# EAGLE board dpad (EAGLE 9.6.2)
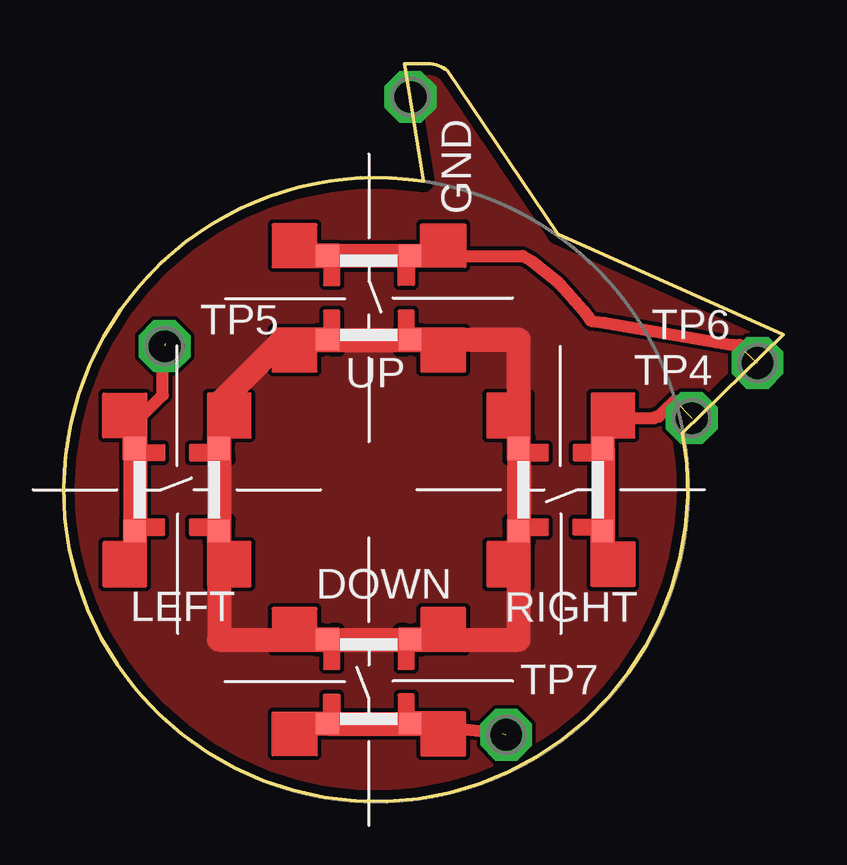
[diagram p0: board, top side]

Size 30 x 30.76 mm. Coordinates in mm from the lower left corner, seen from the top.
Outline: 25.8,15.36 30,19.46 20.6,23.66 16,30.46 arc30 15.3,30.76 14.2,30.76 15,25.86 arc289 25.8,15.36
Copper layers (1*16): Top 0.035mm / dielectric 1.5mm / Bottom 0.035mm
Design rules "default *": minimum track width 6mil, minimum drill 10mil, track to track 6mil, track to pad 6mil, pad to pad 6mil, via to via 6mil, smd to smd 6mil, copper to edge 15mil, drill to drill 6mil, minimum pad ring 5mil, minimum via ring 5mil, stop-mask expansion 4mil, vias tented up to drill 0mil, thermal gap 10mil

## Footprints (pad centres in the part's own frame; a part is rotated, then mirrored left to right if it is on the bottom)
SMD_BUTTON = smd 0.95 x 0.9: 1 -1.725,1.75; 2 1.725,1.75; 3 -1.725,-1.75; 4 1.725,-1.75
P1-13 = drill 1.321 pad 2.159 octagon: TP 0,0

## Placement (x,y rotation side)
DOWN  [SMD_BUTTON]  12.73,4.99 180 top
GND  TPPAD1-13  [P1-13]  14.46,29.37 0 top
LEFT  [SMD_BUTTON]  4.73,12.99 90 top
RIGHT  [SMD_BUTTON]  20.73,12.99 270 top
TP4  TPPAD1-13  [P1-13]  26.19,15.98 0 top
TP5  TPPAD1-13  [P1-13]  4.21,18.98 0 top
TP6  TPPAD1-13  [P1-13]  28.93,18.28 0 top
TP7  TPPAD1-13  [P1-13]  18.45,2.78 0 top
UP  [SMD_BUTTON]  12.73,20.99 0 top

## Library data of the parts
DOWN LEFT RIGHT UP = lib; MPN: B3F-1000; OC_FARNELL: 176432; OC_NEWARK: 36M3542
GND TP4-TP7 = testpad

## Nets
GND: DOWN.3 DOWN.4 GND.TP LEFT.3 LEFT.4 RIGHT.3 RIGHT.4 UP.3 UP.4
N$1: TP6.TP UP.1 UP.2
N$2: LEFT.1 LEFT.2 TP5.TP
N$3: RIGHT.1 RIGHT.2 TP4.TP
N$4: DOWN.1 DOWN.2 TP7.TP

## Tracks (layer width: path | path; a pad name or v marks a point on that pad's centre or on a via)
GND
  Top 0.152: 15.3,30.76 14.2,30.76 15,25.86 arc289 25.8,15.36 30,19.46 20.6,23.66 16,30.46 arc30 15.3,30.76
  Top 1: UP.4 18.98,19.24 RIGHT.3 RIGHT.4 18.98,6.74 DOWN.3 DOWN.4 6.48,6.74 LEFT.3 LEFT.4 6.48,16.65 6.54,16.65 9.13,19.24 UP.3 UP.4 | UP.4 16.03,19.24
  pour Top: 15.3,30.76 14.2,30.76 15,25.86 arc289 25.8,15.36 30,19.46 20.6,23.66 16,30.46 arc30
  pour Top (no thermals): 15.3,28.06 14.9,30.06 15.5,30.06 16.3,28.86
N$1  (1 unrouted)
  Top 0.5: UP.2 19.13,22.74 19.51,22.52 20.67,21.58 21.66,20.48 21.95,20.06 21.98,20.05 22,20.03 22.53,19.96 27.92,19.03 28.17,19.03 28.36,18.84 28.34,18.82
  Top 1: UP.2 UP.1
N$2  (1 unrouted)
  Top 0.5: LEFT.2 2.98,15.78 4.13,16.94 4.13,18.98 4.23,19.08
  Top 1: LEFT.2 LEFT.1
N$3  (1 unrouted)
  Top 0.5: RIGHT.1 22.48,15.98 24.62,15.98 24.68,16.04 24.8,16.04 24.95,16.18 | 24.95,16.18 | 24.95,16.18 25.49,16.71
  Top 1: RIGHT.1 RIGHT.2
N$4  (1 unrouted)
  Top 0.5: 18.3,2.83 14.67,3.24 DOWN.1
  Top 1: DOWN.2 DOWN.1

## Text on the board
bNames: AGB_TACT_dpad_V2.0
203bmp: C:/Users/imax/Desktop/scan_resampled.bmp